# Altium PCB PCB1.PcbDoc
Units mm, origin at the board's own origin, x right, y up, seen from the top; angles counter-clockwise.
Board outline 152.4 x 101.6 mm, 2 copper layers (Top Layer, Bottom Layer); 21 components, 12 nets, 46 pads, 0 vias.
Unrouted connection lines stored in the file: 1.
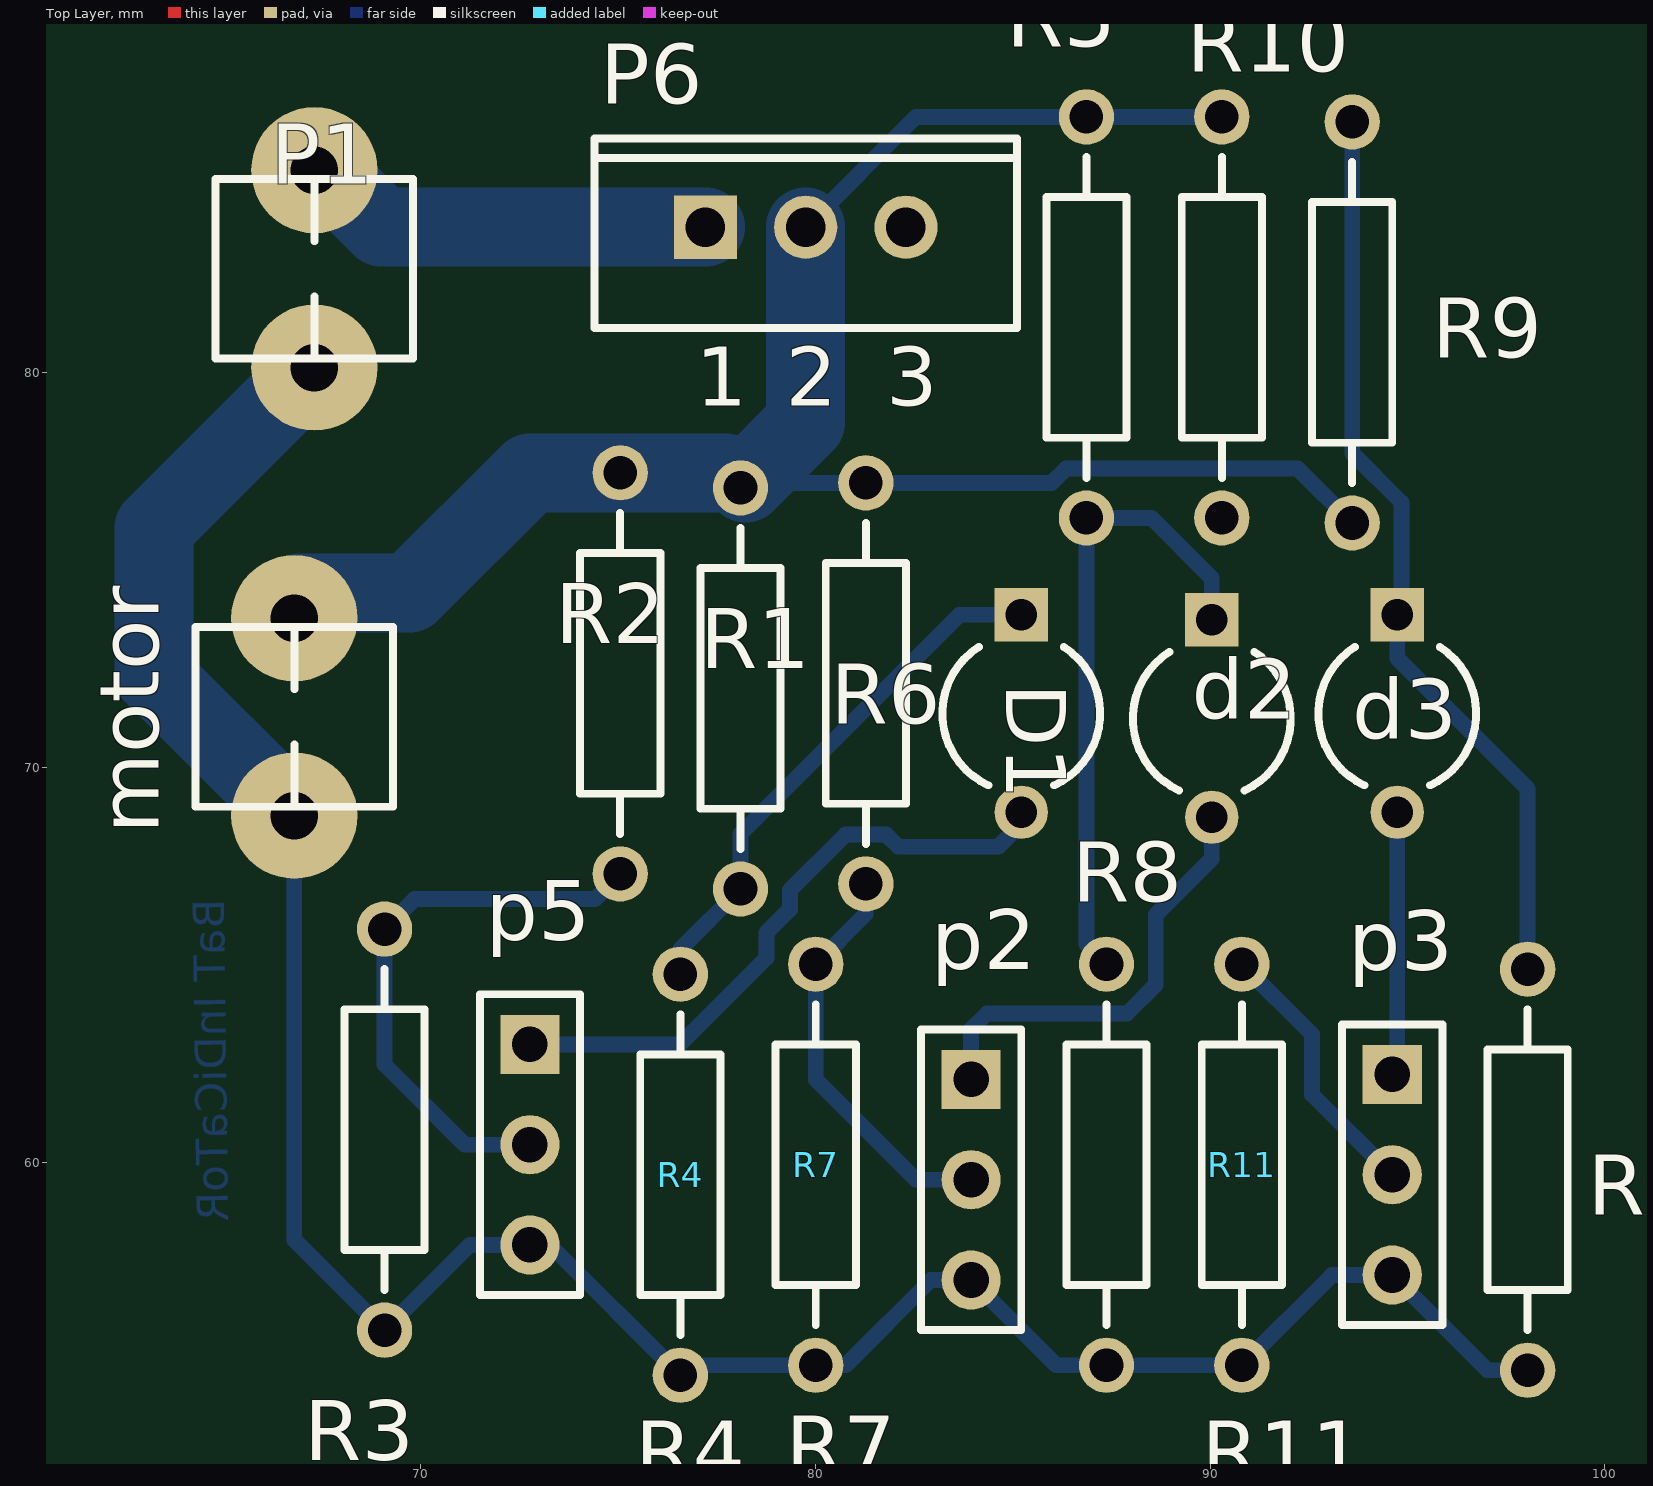
[diagram p0: Top Layer view]
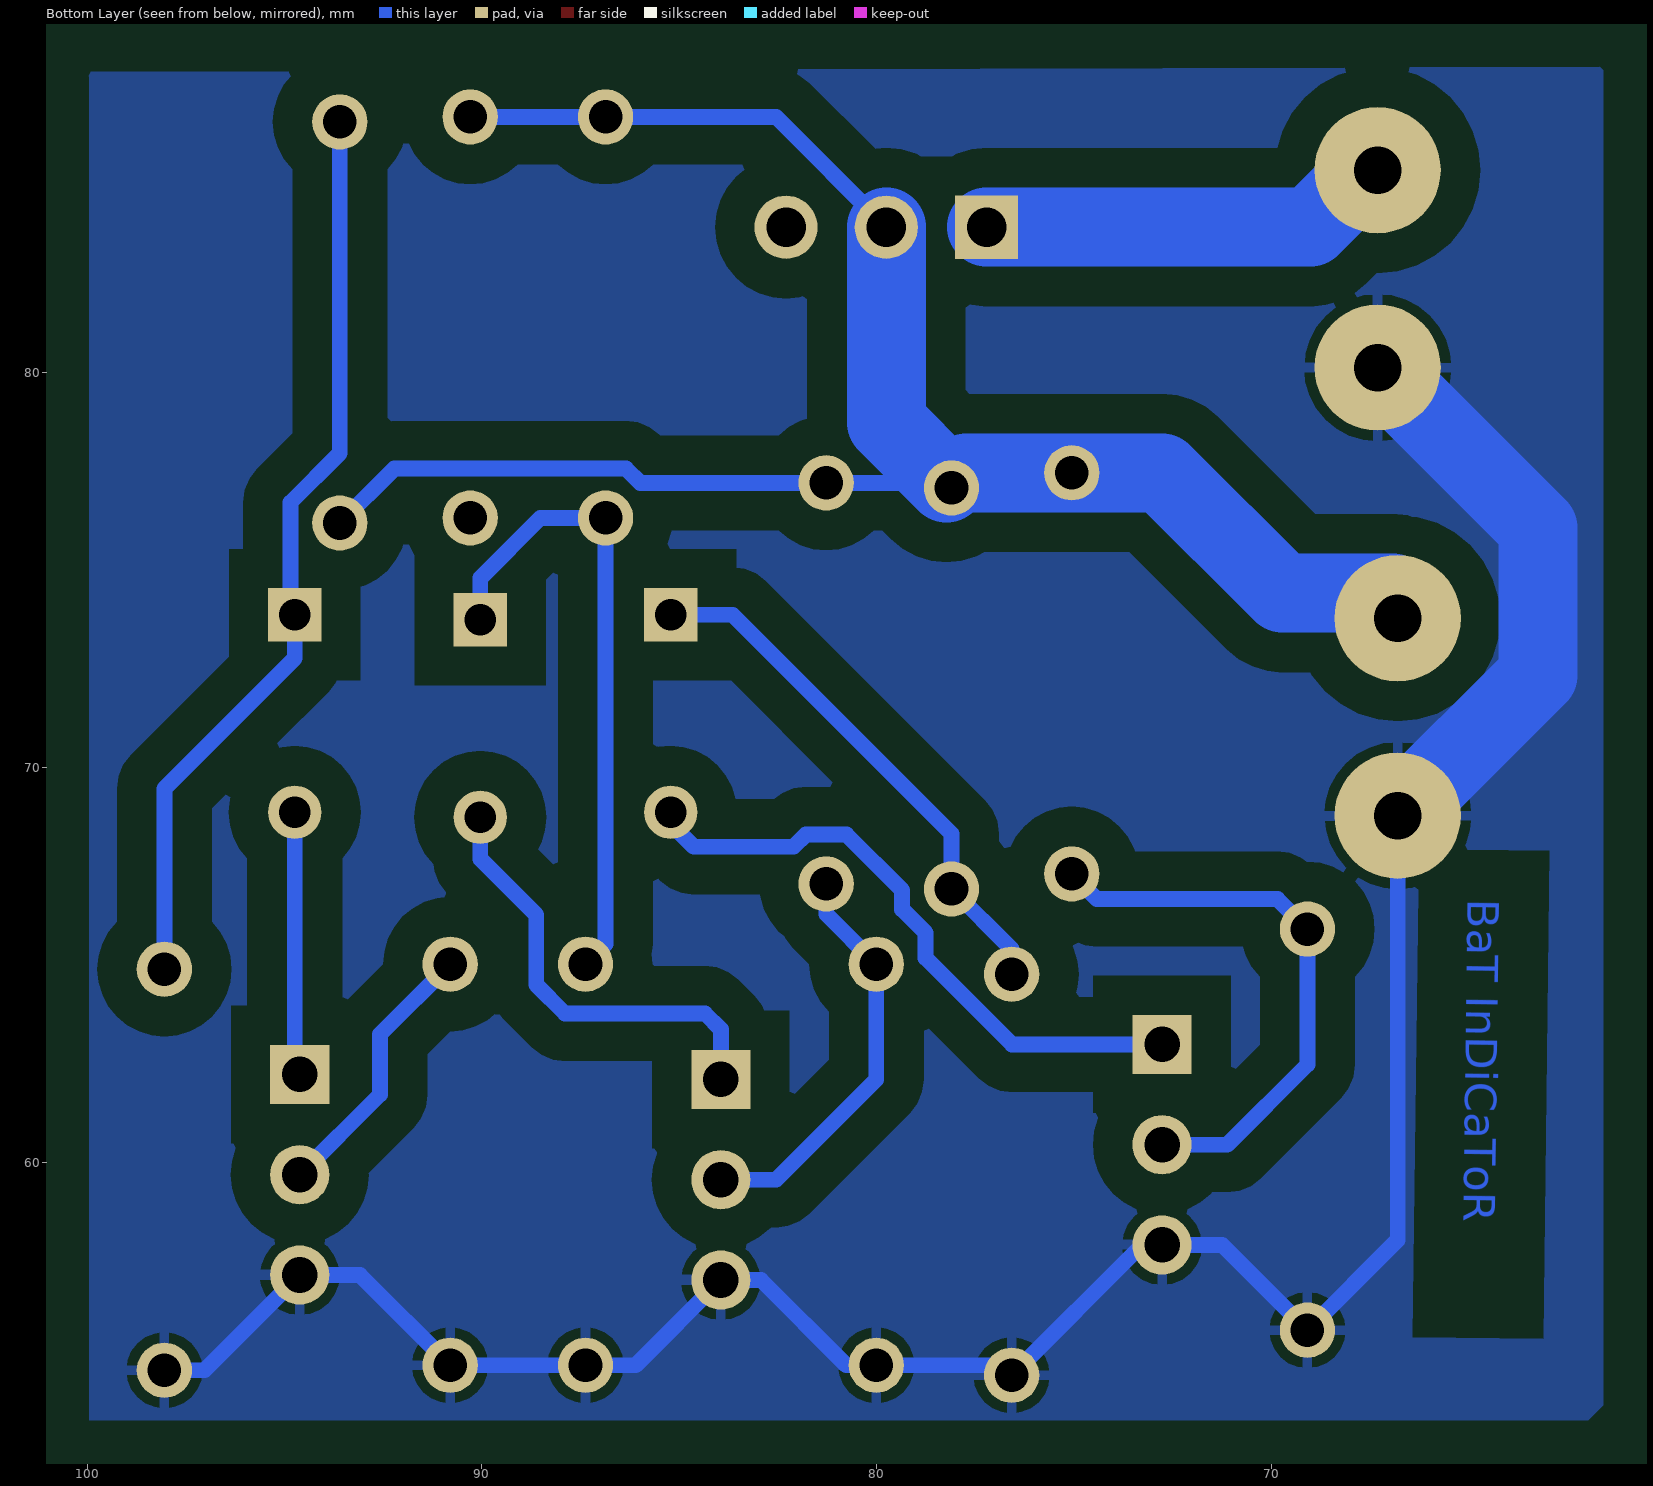
[diagram p1: Bottom Layer view, seen from below]

## Layer stack, top to bottom
Top Solder: solder mask 0.0102, Solder Resist, Dk 3.5
Top Layer: signal copper 0.0356
Dielectric 1: dielectric 0.32, FR-4, Dk 4.8
Bottom Layer: signal copper 0.0356
Bottom Solder: solder mask 0.0102, Solder Resist, Dk 3.5

## Board outline
25.4,25.4 177.8,25.4 177.8,127 25.4,127

## Design rules (kind name [scope] priority, off if disabled: settings)
Clearance [All] p1: gap=0.35
PolygonConnect [All] p1: connectstyle=Relief reliefconductorwidth=0.254 reliefentries=4 polygonreliefangle="90 Angle" airgapwidth=0.254
RoutingVias [All] p1: holewidth=0.711 width=1.27 viastyle="Through Hole" minholewidth=0.711 minwidth=1.27 maxholewidth=0.711 maxwidth=1.27
SolderMaskExpansion [All] p1: expansion=0.102
Width [All] p1: maxlimit=3 minlimit=0.4 preferedwidth=0.4 toplayer_maxwidth=0.4 minimp=50.000000 maximp=50.000000 favimp=50.000000
30 further rules are at their usual default settings.

## Components (designator, comment, footprint, x,y, rotation, side; value= is the part's Value field where it differs from the comment)
D1 "Diode 1N914" CAPR5-4X5 85.217,71.374 r270 top
d2 "Diode 1N914" CAPR5-4X5 90.043,71.247 r270 top
d3 "Diode 1N914" CAPR5-4X5 94.742,71.374 r270 top
motor "Header 2" POH_V3 66.802,73.787 r270 top
P1 "Header 2" POH_V3 67.31,80.137 r90 top
p2 "Header 3" HDR1X3 83.947,62.103 r270 top
p3 "Header 3" HDR1X3 94.615,62.23 r270 top
p5 "Header 3" HDR1X3 72.771,62.992 r270 top
P6 "Header 3" TO-220-AB 79.756,83.693 r0 top
R1 "Res1" AXIAL-0.4 78.105,72.009 r270 top
R2 "Res1" AXIAL-0.4 75.057,72.39 r90 top
R3 "R3" AXIAL-0.4 69.088,60.833 r90 top
R4 "RES" AXIAL-0.4 76.581,59.69 r90 top
R5 "Res1" AXIAL-0.4 86.868,81.407 r270 top
R6 "Res1" AXIAL-0.4 81.28,72.136 r90 top
R7 "Res1" AXIAL-0.4 80.01,59.944 r90 top
R8 "Res1" AXIAL-0.4 87.376,59.944 r90 top
R9 "Res1" AXIAL-0.4 93.599,81.28 r90 top
R10 "Res1" AXIAL-0.4 90.297,81.407 r90 top
R11 "Res1" AXIAL-0.4 90.805,59.944 r90 top
R12 "Res1" AXIAL-0.4 98.044,59.817 r90 top

## Footprints (in the part's own frame and the unit in brackets; to place one, negate y for a bottom-side part, rotate by r counter-clockwise, add the part's x,y. Pads: shape width x height; smd on the part's side, far side on the other; paste and mask are expansions set on the pad)
AXIAL-0.4 [mm] "Axial Device, Thru-Hole; 2 Leads; 0.4 in Pin Spacing"
  round 1.4 hole 0.85: 1(-5.08,0) 2(5.08,0)
  silkscreen extent -4.06,-1.02 4.06,1.02
CAPR5-4X5 [mm] "Capacitor; 2 Leads"
  rect 1.35x1.35 hole 0.8: 1(-2.5,0)
  round 1.35 hole 0.8: 2(2.5,0)
  silkscreen extent -1.69,-2 1.82,2
HDR1X3 [mm] "Connector; Header; 3 Position"
  rect 1.5x1.5 hole 0.9: 1(0,0)
  round 1.5 hole 0.9: 2(2.54,0) 3(5.08,0)
  silkscreen extent -1.27,-1.27 6.35,1.27
POH_V3 [mm]
  round 3.2 hole 1.2: 1(0,0) 2(5,0)
  silkscreen extent 0.23,-2.5 4.77,2.5
TO-220-AB [mm] "TO, Thru-Hole, Vertical, Heatsink Mounted; 3 In-Line Leads; Pitch 2.54 mm"
  rect 1.6x1.6 hole 1: 1(-2.54,0)
  round 1.6 hole 1: 2(0,0) 3(2.54,0)
  silkscreen extent -5.35,-2.55 5.35,2.25

## Part data
D1 d2 d3: "High Conductance Fast Diode"
motor P1: "Header, 2-Pin"
p2 p3 p5 P6: "Header, 3-Pin"
R1 R2 R5 R6 R7 R8 R9 R10 R11 R12: "Resistor"
R3 R4: library part Res1, "Resistor"

## Nets (pads, with @x,y where several pads share a name; then routed paths per layer and width w, separated by ;. In a path a pad name is that pad's centre, name@x,y a point inside that pad or via, vN(x,y) a via of type N, cw(c..) or ccw(c..) an arc to the next point about the centre after c; other vN are vias at no path point)
GND: motor.2 P1.1 p2.3 p3.3 p5.3 R3.1 R4.1 R7.1 R8.1 R11.1 R12.1 | length 63.5
  Bottom Layer w0.4: motor.2 66.802,58.039 R3.1 71.247,57.912 p5.3 73.279,57.912 R4.1 76.835,54.864 R7.1 80.772,54.864 82.931,57.023 p2.3 86.106,54.864 R8.1 R11.1 93.091,57.15 p3.3 97.028,54.737 R12.1
  Bottom Layer w2: motor.2 63.246,72.343 63.246,76.073 P1.1
NetD1_1: D1.1 R1.2 R4.2 | length 13.6
  Bottom Layer w0.4: R4.2 76.581,65.405 R1.2 78.105,68.326 83.653,73.874 D1.1
NetD1_2: D1.2 p5.1 | length 16
  Bottom Layer w0.4: p5.1 76.571,62.992 78.76,65.181 78.76,65.816 79.355,66.411 79.355,66.899 80.762,68.306 81.798,68.306 82.105,67.999 84.636,67.999 85.217,68.58 D1.2
Netd2_1: d2.1 R5.2 R8.2 | length 16.4
  Bottom Layer w0.4: R8.2 86.868,65.532 R5.2 88.519,76.327 90.043,74.803 d2.1
Netd2_2: d2.2 p2.1 | length 11.2
  Bottom Layer w0.4: p2.1 83.947,63.373 84.348,63.774 87.894,63.774 88.626,64.506 88.626,66.274 90.043,67.691 d2.2
Netd3_1: d3.1 R9.2 R12.2 | length 23.4
  Bottom Layer w0.4: R9.2 93.599,77.968 94.849,76.718 94.849,73.981 d3.1 94.742,72.771 98.044,69.469 R12.2
Netd3_2: d3.2 p3.1 | length 6.7
  Bottom Layer w0.4: p3.1 94.742,62.357 d3.2
Netmotor_1: motor.1 P6.2 R1.1 R2.2 R5.1 R6.2 R9.1 R10.2 | length 47.7
  Bottom Layer w0.4: R1.1@77.724,77.47 R1.1 78.232,77.216 R6.2 85.989,77.216 86.35,77.577 92.222,77.577 R9.1 ; P6.2 82.55,86.487 R5.1 R10.2
  Bottom Layer w2: motor.1@66.929,74.422 69.723,74.422 72.771,77.47 R2.2 R1.1@77.724,77.47 ; R1.1@78.232,77.216 79.756,78.74 P6.2
NetP1_2: P1.2 P6.1 | length 10.6
  Bottom Layer w2: P1.2@67.31,85.391 69.008,83.693 P6.1
Netp2_2: p2.2 R6.1 R7.2 | length 10.5
  Bottom Layer w0.4: R6.1 81.28,66.294 R7.2 80.01,62.103 82.55,59.563 p2.2
Netp3_2: p3.2 R10.1 R11.2 | length 6.9
  Bottom Layer w0.4: R11.2 92.583,63.246 92.583,61.722 p3.2
Netp5_2: p5.2 R2.1 R3.2 | length 14.7
  Bottom Layer w0.4: R3.2@68.707,65.913 69.088,65.532 69.088,62.484 71.12,60.452 p5.2 ; R3.2 69.85,66.675 74.422,66.675 R2.1
pads on no net: P6.3

## Polygon pours and split planes (outlines as drawn)
GND on Bottom Layer "Bottom Layer-No Net" (solid, pour order 19): 61.595,87.757 61.595,53.848 61.722,53.721 61.976,53.467 99.949,53.467 99.949,87.503 100.076,87.63

## Other copper
Bottom Layer:
  text "BaT InDiCaToR" at 65.024,66.675 h0.8 r90.74

## Text inside footprints (layer, text, board x,y; h text height)
P6: Top Overlay "1" at 76.966,79.168 h1.5; Top Overlay "2" at 79.256,79.168 h1.5; Top Overlay "3" at 81.796,79.168 h1.5